# Altium PCB ModemMate.PcbDoc
Units mm, origin at the board's own origin, x right, y up, seen from the top; angles counter-clockwise.
Board outline 53.1 x 50 mm, 4 copper layers (Top Layer, GND, GND (Plane2), Bottom Layer), stack 1.582 mm thick; 22 components, 31 nets, 126 pads, 34 vias.
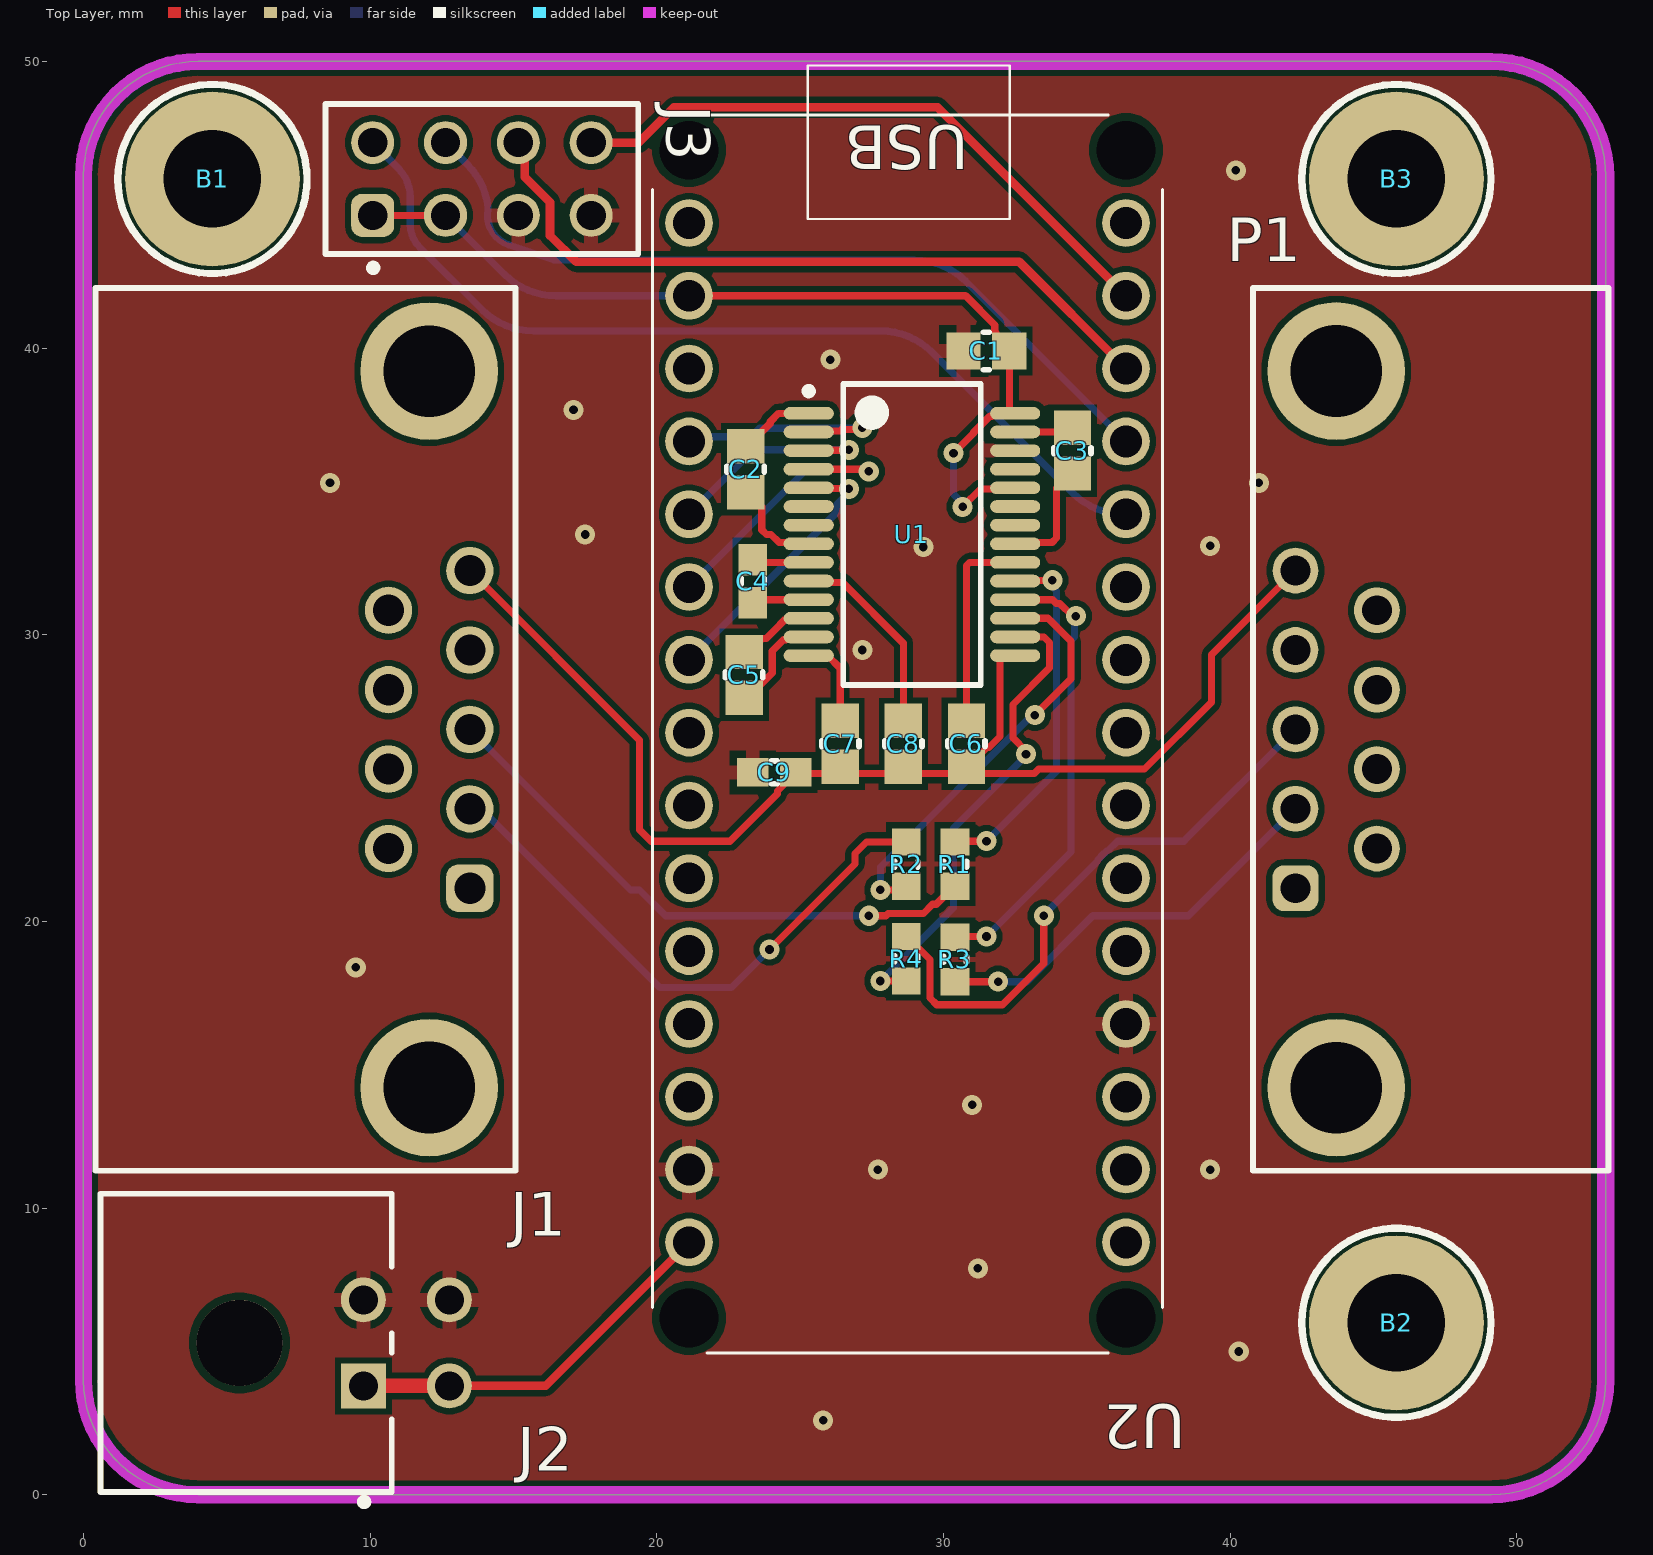
[diagram p0: Top Layer view]
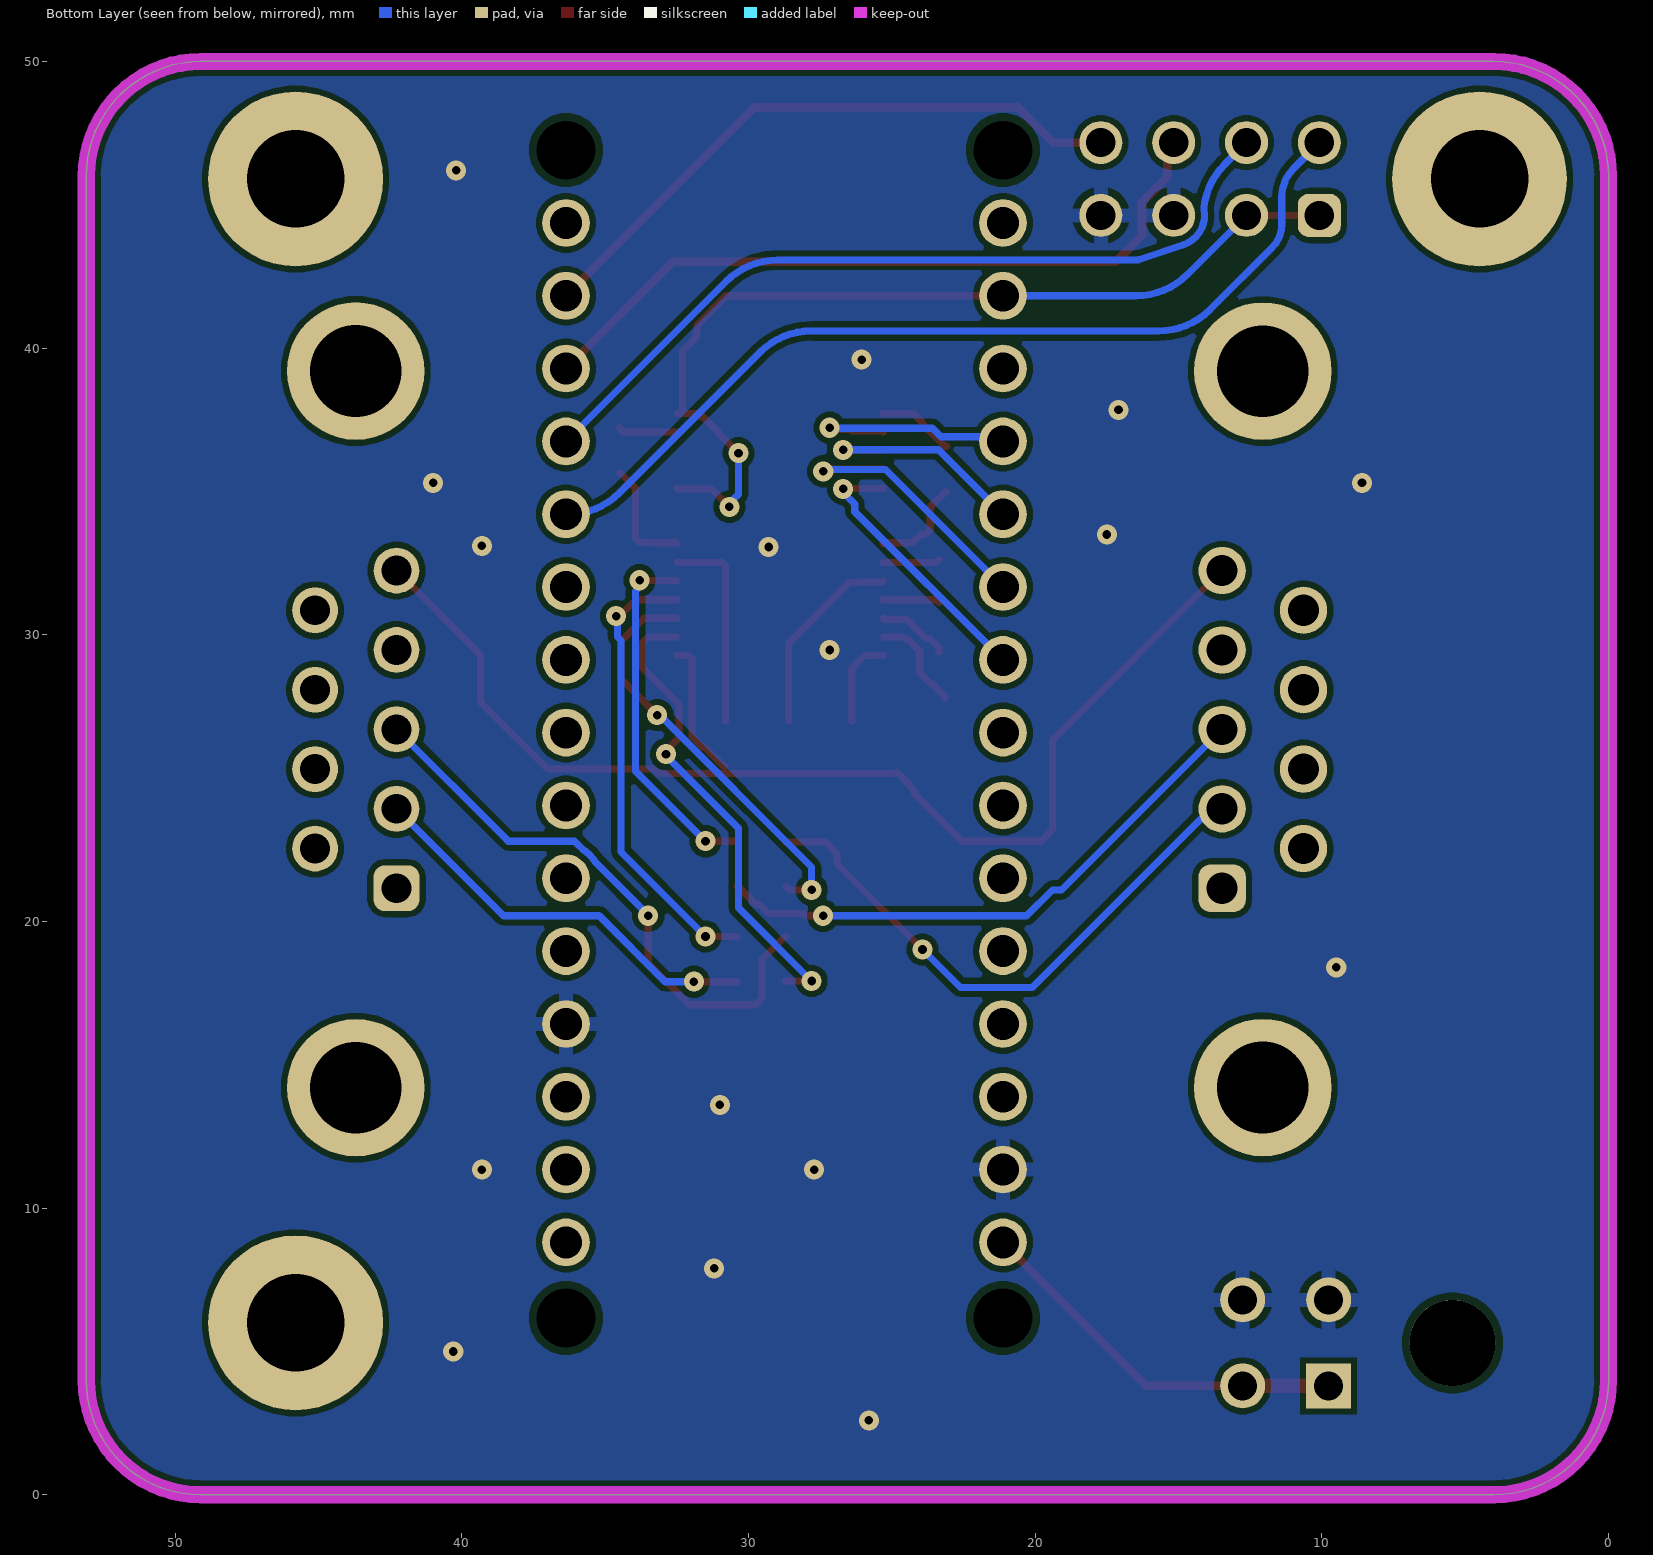
[diagram p1: Bottom Layer view, seen from below]
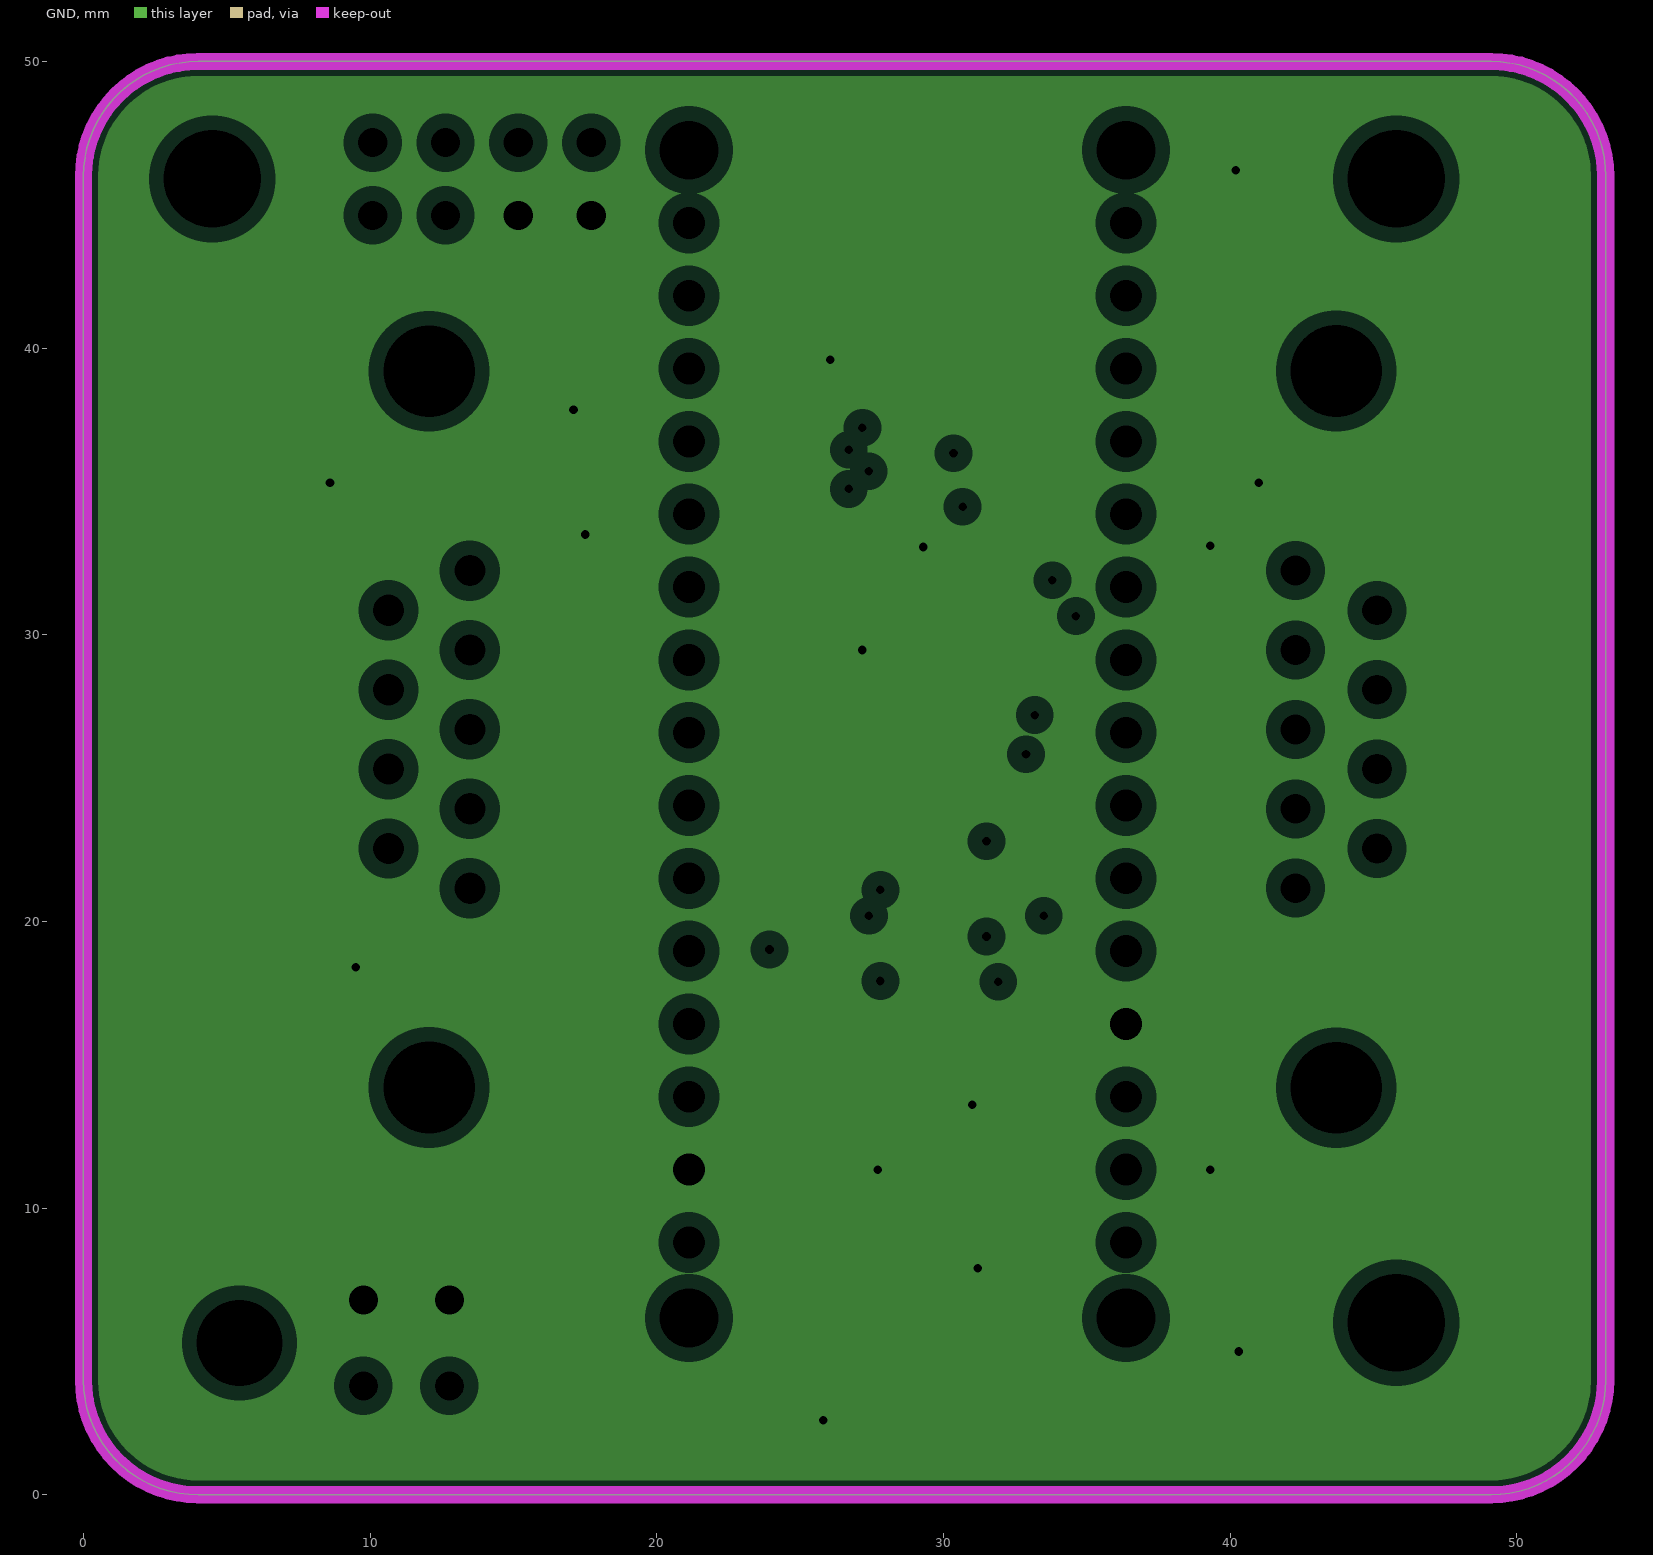
[diagram p2: GND, clearances drawn from the general rule]
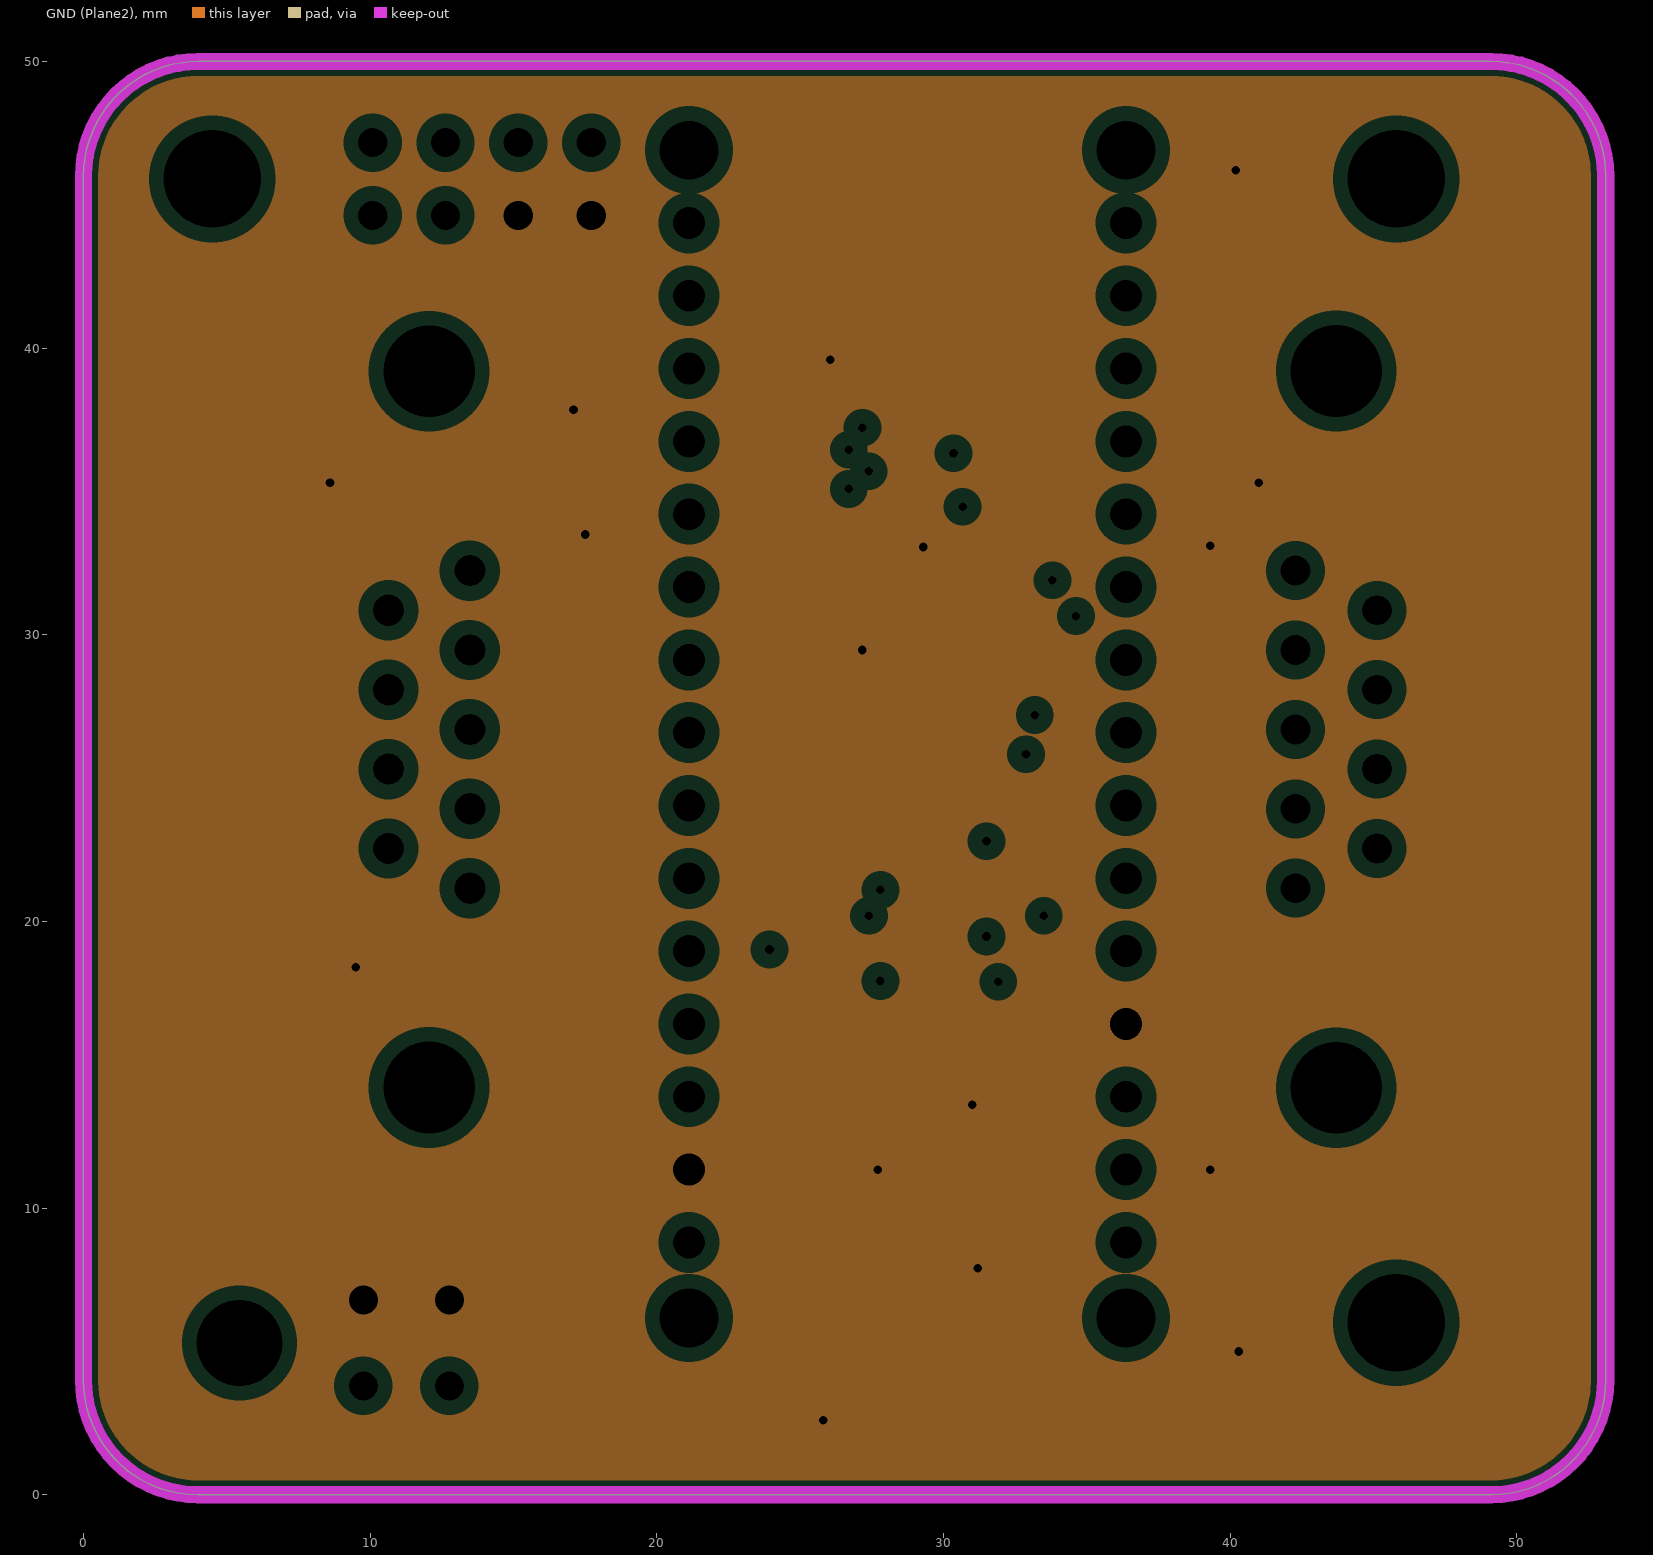
[diagram p3: GND (Plane2), clearances drawn from the general rule]
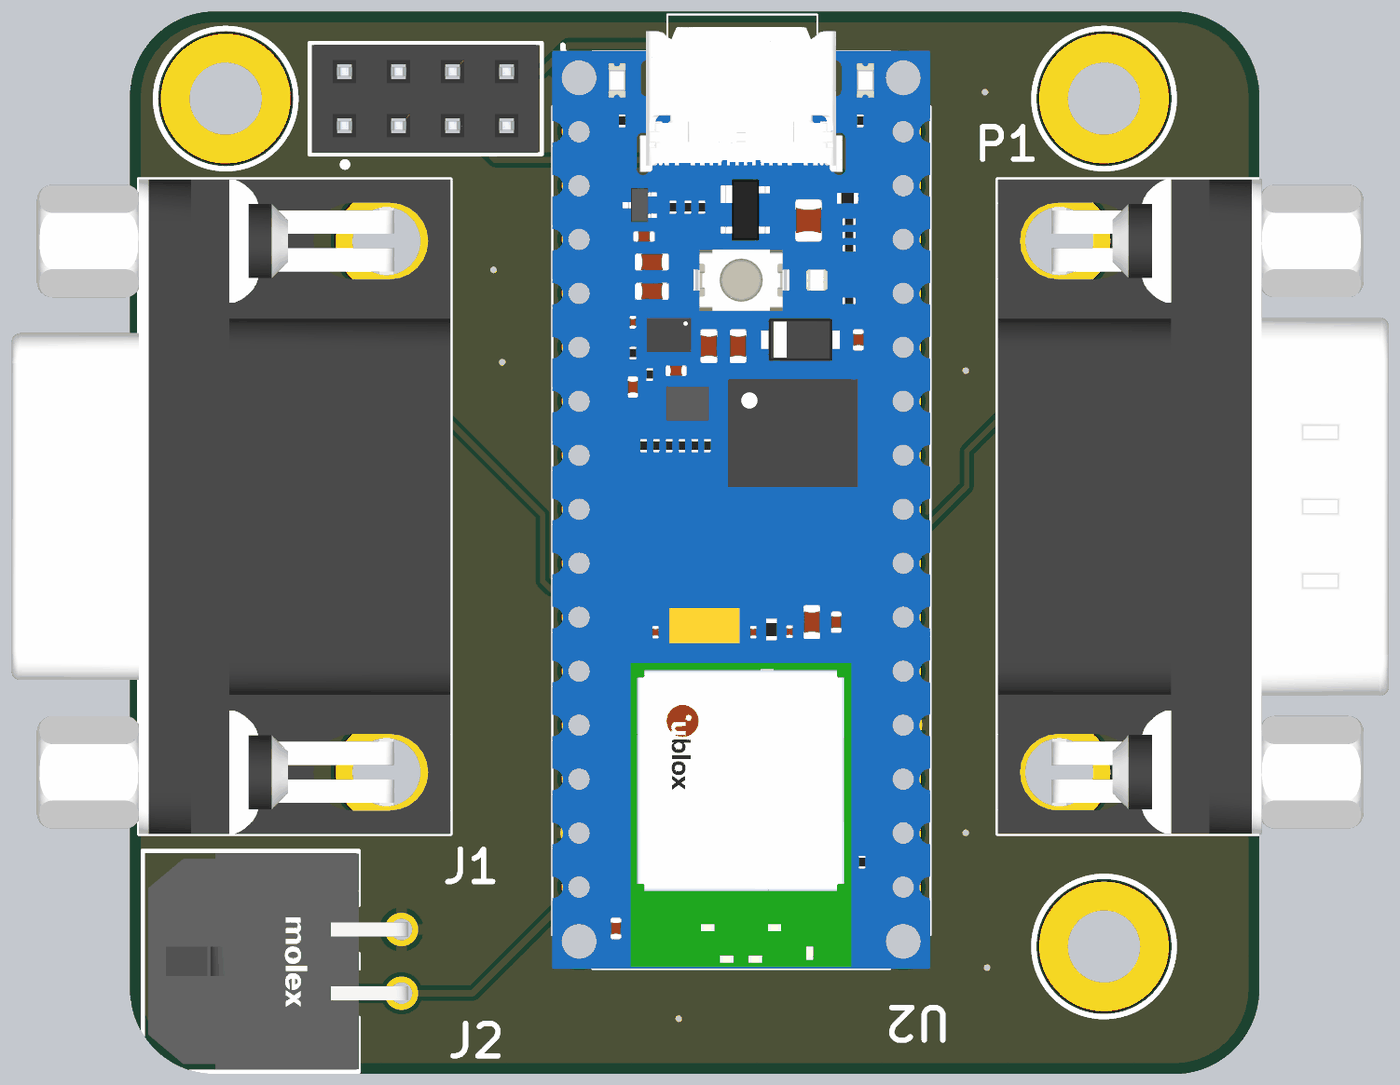
[diagram p4: 3D render of the assembled board from above, using the file's embedded part models]

## Layer stack, top to bottom
Top Solder: solder mask 0.0102, Solder Resist, Dk 3.5
Top Layer: signal copper 0.038
Dielectric1: core 0.21, FR-4, Dk 4.8
GND: plane copper 0.035, net GND
Dielectric 3: prepreg 1.016, Dk 4.2
GND (Plane2): plane copper 0.035, net GND
Dielectric 2: core 0.21, Dk 4.2
Bottom Layer: signal copper 0.038
Bottom Solder: solder mask 0.0102, Solder Resist, Dk 3.5

## Board outline
0,4 0,46 cw(c4,46) 4,50 49.1,50 cw(c49.1,46) 53.1,46 53.1,4 cw(c49.1,4) 49.1,0 4,0 cw(c4,4)

## Design rules (kind name [scope] priority, off if disabled: settings)
AssemblyTestPointUsage [All] p1 off:
AssemblyTestpoint [All] p1 off: testpointundercomponent=TRUE minsize=1.016 maxsize=2.54 preferedsize=1.524 minholesize=0 maxholesize=1.016 preferedholesize=0.813 testpointgrid=0.025 usegrid=TRUE gridtolerance=0 allowsidetop=TRUE allowsidebottom=TRUE
Clearance Mounting [HasFootprintPad('FESTEHULL-3MM',1) or HasFootprintPad('FESTEHULL-4MM',1)] p1: gap=1.295 ignorepadtopadclearanceinfootprint=FALSE except(0: Arc-Hole Track-Hole SMDPad-Hole THPad-Hole Via-Hole Fill-Hole Poly-Hole Region-Hole Text-Hole) // Make space for missaligned washers on mounting holes
Clearance Fiducial [HasFootprint('Fiducial')] p2: gap=0.508 ignorepadtopadclearanceinfootprint=FALSE except(0: Arc-Hole Track-Hole SMDPad-Hole THPad-Hole Via-Hole Fill-Hole Poly-Hole Region-Hole Text-Hole) // Make space around fiducials
Clearance "Min Clearance 2oz" [All] p3: gap=0.203 ignorepadtopadclearanceinfootprint=FALSE except(0.254: Arc-Hole Track-Hole SMDPad-Hole THPad-Hole Via-Hole Fill-Hole Poly-Hole Region-Hole Text-Hole) // Basic worst case isolation distance.
Clearance "Min Clearance 1oz" [All] p4 off: gap=0.152 ignorepadtopadclearanceinfootprint=FALSE except(0.254: Arc-Hole Track-Hole SMDPad-Hole THPad-Hole Via-Hole Fill-Hole Poly-Hole Region-Hole Text-Hole) // Basic worst case isolation distance.
ComponentClearance [not HasFootprint('TP') and not HasFootprint('M1x4') vs not HasFootprint('TP')  and not HasFootprint('M1x4')] p1: gap=0.254 collisioncheckmode=3 verticalgap=0.254 showdistances=FALSE
FabricationTestPointUsage [All] p1 off: valid=0 allowmultiple=FALSE
FabricationTestpoint [All] p1 off: side=3 testpointundercomponent=TRUE minsize=1.016 maxsize=2.54 preferedsize=1.524 minholesize=0 maxholesize=1.016 preferedholesize=0.813 testpointgrid=0.025 allowsidetop=TRUE allowsidebottom=TRUE usegrid=TRUE gridtolerance=0
HoleSize [All] p1: absolutevalues=TRUE maxlimit=6 minlimit=0.3 maxpercent=80.000 minpercent=20.000
MinimumSolderMaskSliver [All] p1 off: minsoldermaskwidth=0.051
NetsToIgnore [InNet('GND')] p1:
ParallelSegment [InNetClass('Cross-Talk')] p1: limit=50 gap=0.45
PlaneClearance [All] p1: clearance=0.508
PlaneConnect [All] p1: planeconnectstyle=Direct reliefexpansion=0.508 reliefentries=4 reliefconductorwidth=0.254 reliefairgap=0.254
PolygonConnect HighCurrent_PolyConnect [All] p1: thpad.connectstyle=Relief thpad.reliefconductorwidth=0.5 thpad.reliefentries=4 thpad.polygonreliefangle="90 Angle" thpad.airgapwidth=0.254 smdpad.connectstyle=Relief smdpad.reliefconductorwidth=0.5 smdpad.reliefentries=4 smdpad.polygonreliefangle="90 Angle" smdpad.airgapwidth=0.254 via.connectstyle=Direct via.reliefconductorwidth=0.5 via.reliefentries=4 via.polygonreliefangle="90 Angle" via.airgapwidth=0.254
PolygonConnect "Via to poly direct" [IsVia] p2: connectstyle=Direct reliefconductorwidth=0.254 reliefentries=4 polygonreliefangle="90 Angle" airgapwidth=0.254
PolygonConnect [All] p3: thpad.connectstyle=Relief thpad.reliefconductorwidth=0.254 thpad.reliefentries=4 thpad.polygonreliefangle="90 Angle" thpad.airgapwidth=0.254 smdpad.connectstyle=Relief smdpad.reliefconductorwidth=0.254 smdpad.reliefentries=4 smdpad.polygonreliefangle="90 Angle" smdpad.airgapwidth=0.254 via.connectstyle=Direct via.reliefconductorwidth=0.254 via.reliefentries=4 via.polygonreliefangle="90 Angle" via.airgapwidth=0.254
RoutingVias [All] p1: holewidth=0.3 width=0.7 viastyle="Through Hole" minholewidth=0.3 minwidth=0.5 maxholewidth=0.3 maxwidth=0.7
SilkToSilkClearance [All] p1 off: silktosilkclearance=0.254
SilkToSolderMaskClearance SilkscreenOverComponentPads [IsPad] p1 off: minsilkscreentomaskgap=0.254 clearancetoexposedcopper=TRUE
SolderMaskExpansion Via_mask [IsVia] p1: expansion=0.102 istentingtop=TRUE
SolderMaskExpansion [All] p2: expansion=0.051 istentingtop=FALSE
SupplyNets "Schematic Supply Nets_1" [InNet('3V3')] p1: voltage=0.000
SupplyNets "Schematic Supply Nets" [InNet('GND')] p2: voltage=0.000
Width [All] p1: maxlimit=2.54 minlimit=0.152 preferedwidth=0.203 minimp=50.000000 maximp=50.000000 favimp=50.000000
19 further rules are at their usual default settings.

## Components (designator, comment, footprint, x,y, rotation, side; value= is the part's Value field where it differs from the comment)
B1 "M3 inside minimum" "M3 minimum" 4.5,45.9 r0 top
B2 "M3 inside minimum" "M3 minimum" 45.8,6 r0 top
B3 "M3 inside minimum" "M3 minimum" 45.8,45.9 r0 top
C1 "2.2u/25V" C0805 31.5,39.9 r180 top value=2.2µF
C2 "0.47u/100V" C0805 23.1,35.775 r90 top value=470nF
C3 "0.47u/100V" C0805 34.5,36.425 r90 top value=470nF
C4 "0.1u/100V" C0603 23.35,31.875 r270 top value=100nF
C5 "0.47u/100V" C0805 23.05,28.6 r270 top value=470nF
C6 "2.2u/25V" C0805 30.8,26.2 r270 top value=2.2µF
C7 "0.47u/100V" C0805 26.4,26.2 r270 top value=470nF
C8 "0.47u/100V" C0805 28.6,26.2 r270 top value=470nF
C9 "10n/100V" C0603 24.1,25.2 r180 top value=10nF
J1 "Dsub 9 pin Female right angle" 618009231321 7.7,26.7 r270 top
J2 "Micro-Fit 4pin Horizontal THT" 43045-0400 5.8,5.3 r270 top
J3 "Pin header 2x4" 61300821821 13.9,45.9 r0 top
P1 "Dsub 9 pin Male right angle" 618009231221 47,26.7 r90 top
R1 "0R" R0603 30.4,22 r90 top value=0
R2 "0R" R0603 28.7,22 r270 top value=0
R3 "0R" R0603 30.4,18.675 r90 top value=0
R4 "0R" R0603 28.7,18.7 r270 top value=0
U1 "MAX3250EAI+" "SSOP-28P, no-thermal" 28.9,33.5 r0 top
U2 "ArduinoNano ESP32" "Copy of New footprint 1" 29.5,30 r180 top locked

## Footprints (in the part's own frame and the unit in brackets; to place one, negate y for a bottom-side part, rotate by r counter-clockwise, add the part's x,y. Pads: shape width x height; smd on the part's side, far side on the other; paste and mask are expansions set on the pad)
43045-0400 [mm]
  rect 1.57x1.57 hole 1.02 paste-2539.97 mask+0: 1(1.5,3.965)
  round 1.57 hole 1.02 paste-2539.97 mask+0: 2(-1.5,3.965) 3(1.5,6.965) 4(-1.5,6.965)
  round 3 hole 3 unplated paste-2539.97 mask+0: H1(0,-0.355)
  silkscreen extent -5.2,-5.21 5.67,4.95, body extent -5.3,-5.31 5.3,7.85, height 0.25
61300821821 [mm] "Socket Header, Pitch 2.54 mm, THT, Vertical, dual row, 8p"
  rrect50% 1.5x1.5 hole 1.02: 1(-3.81,-1.27)
  round 1.5 hole 1.02: 2(-3.81,1.27) 3(-1.27,-1.27) 4(-1.27,1.27) 5(1.27,-1.27) 6(1.27,1.27) 7(3.81,-1.27) 8(3.81,1.27)
  silkscreen extent -5.46,-3.22 5.46,2.62, body extent -5.33,-2.54 5.33,2.54, height 8.45
618009231221 [mm] "9 pins, right angled, 8.08mm, with hex screw"
  rrect50% 1.6x1.6 hole 1.04: 1(-5.54,4.72)
  round 1.6 hole 1.04: 2(-2.77,4.72) 3(0,4.72) 4(2.77,4.72) 5(5.54,4.72) 6(-4.155,1.88) 7(-1.385,1.88) 8(1.385,1.88) 9(4.155,1.88)
  round 4.8 hole 3.2: M1(-12.5,3.3) M2(12.5,3.3)
  silkscreen extent -15.4,-6.2 15.4,6.2, body extent -15.4,-12.2 15.4,6.2, height 12.57
618009231321 [mm] "9 pins, right angled, 10.3mm, with hex screw"
  rrect50% 1.65x1.65 hole 1.09: 1(5.54,5.78)
  round 1.65 hole 1.09: 2(2.77,5.78) 3(0,5.78) 4(-2.77,5.78) 5(-5.54,5.78) 6(4.155,2.94) 7(1.385,2.94) 8(-1.385,2.94) 9(-4.155,2.94)
  round 4.8 hole 3.2: M1(-12.495,4.36) M2(12.495,4.36)
  silkscreen extent -15.4,-7.28 15.4,7.37, body extent -15.41,-13.28 15.41,7.37, height 12.57
C0603 [mm] "Chip Capacitor, 2-Leads, Body 1.60x0.80mm, IPC Medium Density"
  rect 1.1x1 smd: 1(-0.75,0) 2(0.75,0)
  silkscreen extent -0.1,-0.4 0.1,0.4, body extent -0.9,-0.5 0.9,0.5, height 1
C0805 [mm] "Chip Capacitor, 2-Leads, Body 2.00x1.20mm, IPC Medium Density"
  rect 1.2x1.3 smd: 1(-0.8,0) 2(0.8,0)
  silkscreen extent -0.1,-0.65 0.1,0.65, body extent -1.05,-0.63 1.05,0.63, height 0.95
"Copy of New footprint 1" [mm]
  round 1.665 hole 1.11: 1(-6.866,21.194) 2(-6.866,18.654) 3(-6.866,16.114) 4(-6.866,13.574) 5(-6.866,11.034) 6(-6.866,8.494) 7(-6.866,5.954) 8(-6.866,3.414) 9(-6.866,0.874) 10(-6.866,-1.666) 11(-6.866,-4.206) 12(-6.866,-6.746) 13(-6.866,-9.286) 14(-6.866,-11.826) 15(-6.866,-14.366) 16(8.374,-14.366) 17(8.374,-11.826) 18(8.374,-9.286) 19(8.374,-6.746) 20(8.374,-4.206) 21(8.374,-1.666) 22(8.374,0.874) 23(8.374,3.414) 24(8.374,5.954) 25(8.374,8.494) 26(8.374,11.034) 27(8.374,13.574) 28(8.374,16.114) 29(8.374,18.654) 30(8.374,21.194)
  round 1.025 hole 2.05 unplated: MH1(-6.866,23.834) MH2(8.374,23.834) MH3(-6.866,-16.906) MH4(8.374,-16.906)
  silkscreen extent -8.14,-19.86 9.64,25.05, body extent -8.13,-19.26 9.65,25.03, height 7.29
"M3 minimum" [mm] "Mounting hole for M3 bolts not reccomended for nuts(tools will not fit)"
  round 6.1 hole 3.4: 1(0,0)
  silkscreen extent -3.3,-3.3 3.3,3.3
R0603 [mm] "Resistor 0603"
  rect 0.95x1 smd: 1(-0.775,0) 2(0.775,0)
  silkscreen extent -0.1,-0.4 0.1,0.4, body extent -0.8,-0.4 0.8,0.4, height 0.4
"SSOP-28P, no-thermal" [mm] "Form TI"
  oval 1.75x0.44 smd mask+0.07: 1(-3.6,4.225) 2(-3.6,3.575) 3(-3.6,2.925) 4(-3.6,2.275) 5(-3.6,1.625) 6(-3.6,0.975) 7(-3.6,0.325) 8(-3.6,-0.325) 9(-3.6,-0.975) 10(-3.6,-1.625) 11(-3.6,-2.275) 12(-3.6,-2.925) 13(-3.6,-3.575) 14(-3.6,-4.225) 15(3.6,-4.225) 16(3.6,-3.575) 17(3.6,-2.925) 18(3.6,-2.275) 19(3.6,-1.625) 20(3.6,-0.975) 21(3.6,-0.325) 22(3.6,0.325) 23(3.6,0.975) 24(3.6,1.625) 25(3.6,2.275) 26(3.6,2.925) 27(3.6,3.575) 28(3.6,4.225)
  silkscreen extent -3.72,-5.25 2.4,5.25, body extent -3.9,-5.25 3.9,5.25, height 2

## Part data
B1 B2 B3: library part CMP-00028-00013-3, "smaller M3 mounting holde for inside the PCB. should not be used for nuts(tools will not fit)", Case/Package=M3
C1 C6: library part CMP-00124-3, "2.2µF, 25V, 0805", Case/Package=0805, Dielectric=X7R, Tolerance=10%, Voltage=25V
C2 C3 C5 C7 C8: library part CMP-001-00015-1, "0.47uF, 100V, 0805", Case/Package=0805, Dielectric=Ceramic, Tolerance=10%, Voltage=100V
C4: library part CMP-001-00000-2, "0.1μF, 100V, 0603", Case/Package=0603, Dielectric=X7R, Tolerance=10%, Voltage=100V
C9: library part CMP-00133-2, "10nF, 100V, 0603", Case/Package=0603, Dielectric=X7R, Tolerance=10%, Voltage=100V
J1: library part CMP-00660-1, "9 Way Right Angle Through Hole Pcb D-sub Connector Socket, 2.77MM, 2.84MM Pitch", Current Rating=3A, Manufacturer="Wurth elektronik", Part name=618009231321, Voltage Rating=125V, Contact Plating=Gold, Mounting Angle="Right Angle", Mounting Style="Through Hole", Number of Positions=9, Number of Rows=2
J2: library part CMP-002-00021-4, "Rectangular Power Connector, 4 Contact(s), Male, Solder Terminal, Plug", Current Rating=8.5A, Manufacturer=Molex, Part name=43045-0400, Voltage Rating=250V, Contact Plating=Tin, Mounting Angle="Right Angle", Mounting Style="Through Hole", Number of Positions=4, Number of Rows=2
J3: library part CMP-00552-1, "Board Connector, 8 Contact(s), 2 Row(s), Female, Straight, 0.1 inch Pitch, Solder Terminal, Locking, Black Insulator, Socket", Current Rating=3A, Manufacturer="Wurth Elektronik", Part name=61300821821, Voltage Rating=250V, Contact Plating=Gold, Mounting Angle=Vertical, Mounting Style="Through Hole", Number of Positions=8, Number of Rows=2
P1: library part CMP-00659-1, "9 Way Right Angle Through Hole Pcb D-sub Connector Plug, 2.77MM, 2.84MM Pitch", Current Rating=3A, Manufacturer="Wurth Eletronik", Part name=618009231221, Voltage Rating=125V, Contact Plating=Gold, Mounting Angle="Right Angle", Mounting Style="Through Hole", Number of Positions=9, Number of Rows=2
R1 R2 R3 R4: library part CMP-00047-3, "Resistor 0R, 0603, 1%, SMD", Case/Package=0603, Power=100mW, Tolerance=1%, Voltage=75V
U1: library part CMP-00252-2, "isolated Line Transceiver, 2 Func, 2 Driver, 2 Rcvr, BICMOS, PDSO28", Case/Package="SSOP 28", Current Rating=35mA, Manufacturer=Maxim, Max Supply Voltage=5.5V, Min Operating Temperature=-40°C, Min Supply Voltage=3V, Max Supply Current=35mA, Part name=MAX3250EAI+, Voltage Rating=5.5V
U2: library part CMP-00661-1, "Arduino nano development board", Case/Package=Nano, Current Rating=25mA, Manufacturer=Arduino, Part name="Nano ESP32", Voltage Rating=5V

## Via types
v1: diameter 0.7, hole 0.3, Top Layer to Bottom Layer, tented both sides, 34 vias

## Nets (pads, with @x,y where several pads share a name; then routed paths per layer and width w, separated by ;. In a path a pad name is that pad's centre, name@x,y a point inside that pad or via, vN(x,y) a via of type N, cw(c..) or ccw(c..) an arc to the next point about the centre after c; other vN are vias at no path point)
3V3: C1.1 J3.1 J3.3 U1.24 U1.28 U2.17 | length 33.4
  Top Layer w0.25: J3.1 J3.3 ; U2.17 30.774,41.826 31.789,40.811 31.789,40.571 31.825,40.535 31.825,40.375 C1.1 32.3,37.846 U1.28@32.421,37.725 ; v1(30.35,36.334) 31.057,37.041 31.057,37.063 31.618,37.623 31.692,37.623 31.794,37.725 U1.28@32.421,37.725 ; v1(30.668,34.464) 31.292,35.089 32.464,35.089 U1.24 ; U1.28 U1.28@32.421,37.725
  Bottom Layer w0.25: J3.3 14.69,42.57 ccw(c16.486,44.366) 16.486,41.826 U2.17 ; v1(30.35,36.334) 30.35,34.903 30.668,34.586 v1(30.668,34.464)
GND: C1.2 C9.2 J2.2 J2.4 J3.5 J3.7 U1.26 U2.4 U2.29
  other v1: 25.8,2.6 40.3,5 31.2,7.9 27.713,11.346 39.3,11.346 31,13.6 9.5,18.4 27.173,29.47 29.301,33.063 39.3,33.1 17.5,33.5 8.6,35.3 41,35.3 17.094,37.846 26.057,39.6 40.2,46.2
ISO_GND: C6.2 C7.2 C8.2 C9.1 J1.5 P1.5 U1.15 | length 44.4
  Top Layer w0.25: J1.5 19.4,26.32 19.4,23.2 19.8,22.8 22.55,22.8 24.206,24.456 24.206,24.556 24.425,24.775 24.425,24.825 24.8,25.2 C9.1 24.892,25.158 33.166,25.158 33.323,25.315 37.015,25.315 39.347,27.647 39.347,29.307 P1.5 ; C6.2 30.85,25.4 31.522,26.072 31.586,26.072 31.968,26.454 31.968,29.187 32.056,29.275 U1.15
NetC2_1: C2.1 U1.8 | length 3.4
  Top Layer w0.25: C2.1 23.15,34.975 23.661,34.464 23.661,33.666 23.824,33.503 23.986,33.503 24.264,33.225 24.46,33.225 24.474,33.211 25.264,33.211 U1.8
NetC2_2: C2.2 U1.1 | length 2.7
  Top Layer w0.25: C2.2 23.15,36.575 23.956,37.381 23.956,37.431 24.25,37.725 U1.1
NetC3_1: C3.1 U1.21 | length 4
  Top Layer w0.25: U1.21 32.536,33.211 33.326,33.211 33.34,33.225 33.792,33.225 33.939,33.372 33.939,35.114 34.45,35.625 C3.1
NetC3_2: C3.2 U1.27 | length 2.1
  Top Layer w0.25: U1.27 34.35,37.075 C3.2
NetC4_1: C4.1 U1.9 | length 2
  Top Layer w0.25: C4.1 23.45,32.525 U1.9
NetC4_2: C4.2 U1.11 | length 2
  Top Layer w0.25: C4.2 23.45,31.225 U1.11
NetC5_1: C5.1 U1.12 | length 2.5
  Top Layer w0.25: C5.1@23.35,29.4 23.35,29.55 23.675,29.875 23.821,29.875 24.097,30.151 ; 24.097,30.152 24.483,30.539 25.264,30.539 U1.12
NetC5_2: C5.2 U1.13 | length 3.5
  Top Layer w0.25: C5.2@23.15,27.8 23.15,27.85 23.575,28.275 23.639,28.275 24.028,28.664 24.028,29.433 24.425,29.83 24.499,29.83 24.594,29.925 U1.13
NetC6_1: C6.1 U1.20 | length 7.2
  Top Layer w0.25: C6.1 30.8,32.421 30.904,32.525 U1.20
NetC7_1: C7.1 U1.14 | length 3.1
  Top Layer w0.25: U1.14 25.955,29.275 26.4,28.83 C7.1
NetC8_1: C8.1 U1.10 | length 6.9
  Top Layer w0.25: U1.10 25.336,31.839 26.126,31.839 26.14,31.825 26.484,31.825 28.6,29.709 C8.1
NetJ3_2: J3.2 U2.11 | length 32.4
  Bottom Layer w0.25: J3.2 10.966,46.294 cw(c9.919,45.246) 11.4,45.246 11.4,44.325 ccw(c12.567,44.325) 11.742,43.5 13.898,41.344 ccw(c15.694,43.14) 15.694,40.6 27.805,40.6 cw(c27.805,38.06) 29.601,39.856 34.507,34.95 ccw(c36.303,36.746) 36.303,34.206 U2.11
NetJ3_4: J3.4 U2.12 | length 28.5
  Bottom Layer w0.25: J3.4 13.389,46.411 cw(c11.593,44.615) 14.115,44.915 cw(c13.867,44.886) 14.112,44.838 ccw(c15.17,44.63) 14.125,44.364 ccw(c15.17,44.63) 14.827,43.608 16.392,43.083 ccw(c16.471,43.32) 16.471,43.07 28.99,43.07 cw(c28.99,40.53) 30.786,42.326 U2.12
NetJ3_6: J3.6 U2.13 | length 25.7
  Top Layer w0.3: J3.6 15.39,46.95 15.39,45.97 16.273,45.087 16.273,43.927 17.188,43.012 32.64,43.012 U2.13
NetJ3_8: J3.8 U2.14 | length 21.9
  Top Layer w0.3: J3.8 19.369,47.17 20.599,48.4 29.792,48.4 U2.14
NetR1_2: R1.2 U1.19 | length 12.6
  Top Layer w0.25: R1.2 30.425,22.8 v1(31.5,22.8) ; U1.19 32.514,31.889 33.786,31.889 v1(33.8,31.903)
  Bottom Layer w0.25: v1(31.5,22.8) 33.942,25.242 33.942,31.532 33.886,31.588 33.886,31.817 v1(33.8,31.903)
NetR2_2: R2.2 U1.17 | length 14.7
  Top Layer w0.25: v1(27.8,21.1) 28.575,21.1 R2.2 ; U1.17 33.648,30.575 34.45,29.773 34.45,28.463 v1(33.187,27.2)
  Bottom Layer w0.25: v1(27.8,21.1) 27.8,21.9 33.1,27.2 v1(33.187,27.2)
NetR3_2: R3.2 U1.18 | length 15.9
  Top Layer w0.25: R3.2 30.425,19.475 v1(31.5,19.475) ; U1.18 33.8,31.225 33.932,31.093 34.059,31.093 34.499,30.654 v1(34.62,30.654)
  Bottom Layer w0.25: v1(31.5,19.475) 34.45,22.425 34.45,29.804 34.575,29.929 34.575,30.608 v1(34.62,30.654)
NetR4_2: R4.2 U1.16 | length 16.8
  Top Layer w0.25: v1(27.8,17.925) R4.2 ; U1.16 33.51,29.925 33.703,29.732 33.703,28.848 32.421,27.566 32.421,26.405 32.877,25.949 v1(32.877,25.836)
  Bottom Layer w0.25: v1(27.8,17.925) 30.35,20.475 30.35,23.25 32.877,25.777 v1(32.877,25.836)
RX_RS232_1: J1.3 R1.1 | length 20
  Top Layer w0.25: v1(27.4,20.2) 27.986,20.2 28.064,20.278 29.301,20.278 29.621,20.598 29.748,20.598 30.375,21.225 R1.1
  Bottom Layer w0.25: J1.3 19.08,21.1 19.4,21.1 20.3,20.2 v1(27.4,20.2)
RX_RS232_2: P1.2 R3.1 | length 14.4
  Top Layer w0.25: R3.1 v1(31.906,17.9)
  Bottom Layer w0.25: v1(31.906,17.9) 32.911,17.9 35.211,20.2 38.55,20.2 P1.2
RX_UART_1: U1.2 U2.19 | length 8.2
  Top Layer w0.25: U1.2 25.336,37.111 26.399,37.111 26.448,37.16 27.111,37.16 v1(27.173,37.223)
  Bottom Layer w0.25: U2.19 21.286,36.906 23.288,36.906 23.583,37.202 27.153,37.202 v1(27.173,37.223)
RX_UART_2: U1.3 U2.20 | length 7.9
  Top Layer w0.25: U1.3 25.314,36.439 26.686,36.439 v1(26.7,36.453)
  Bottom Layer w0.25: U2.20 23.373,36.453 v1(26.7,36.453)
TX_RS232_1: J1.2 R2.1 | length 20.1
  Top Layer w0.25: v1(23.932,19.023) 26.915,22.006 26.915,22.373 27.317,22.775 R2.1
  Bottom Layer w0.25: J1.2 13.87,23.93 20.1,17.7 22.61,17.7 v1(23.932,19.023)
TX_RS232_2: P1.3 R4.1 | length 20.3
  Top Layer w0.25: R4.1 28.725,19.475 29.528,18.672 29.528,17.333 29.764,17.097 32.062,17.097 33.5,18.534 v1(33.5,20.2)
  Bottom Layer w0.25: v1(33.5,20.2) 33.5,20.23 35.347,22.077 35.425,22.185 cw(c36.366,21.506) 35.687,22.447 35.795,22.525 35.996,22.727 36.07,22.8 38.38,22.8 38.453,22.873 P1.3
TX_UART1: U1.4 U2.21 | length 10.1
  Top Layer w0.25: U1.4 27.322,35.775 v1(27.394,35.703)
  Bottom Layer w0.25: U2.21 25.227,35.767 27.33,35.767 v1(27.394,35.703)
TX_UART2: U1.5 U2.22 | length 9.7
  Top Layer w0.25: U1.5 25.318,35.107 26.682,35.107 v1(26.7,35.089)
  Bottom Layer w0.25: U2.22 26.293,34.293 26.293,34.561 26.7,34.967 v1(26.7,35.089)
Vin: J2.1 J2.3 U2.30 | length 13.4
  Top Layer w0.3: J2.3 16.12,3.8 U2.30
  Top Layer w0.5: J2.1 J2.3
pads on no net: B1.1 B2.1 B3.1 J1.1 J1.4 J1.6 J1.7 J1.8 J1.9 J1.M1 J1.M2 J2.H1 P1.1 P1.4 P1.6 P1.7 P1.8 P1.9 P1.M1 P1.M2 U1.6 U1.7 U1.22 U1.23 U1.25 U2.1 U2.2 U2.3 U2.5 U2.6 U2.7 U2.8 U2.9 U2.10 U2.15 U2.16 U2.18 U2.23 U2.24 U2.25 U2.26 U2.27 U2.28 U2.MH1 U2.MH2 U2.MH3 U2.MH4

## Polygon pours and split planes (outlines as drawn)
GND on Bottom Layer "NONET_L01_P-001" (solid, remove dead copper, pour order 1): 0,47.7 2.3,50 50.7,50 53.1,47.6 53.1,2.3 50.8,0 2.3,0 0,2.3 0,4
GND on Top Layer "NONET_L01_P-001" (solid, remove dead copper, pour order 0): 0,47.7 2.3,50 50.7,50 53.1,47.6 53.1,2.3 50.8,0 2.3,0 0,2.3 0,4
GND on GND (Plane2) (split plane): 49.349,49.483 49.597,49.456 49.842,49.412 50.084,49.35 50.32,49.272 50.55,49.176 50.773,49.065 50.988,48.937 51.192,48.795 51.387,48.639 51.569,48.469 51.739,48.287 51.895,48.092 52.037,47.888 52.165,47.673 52.276,47.45 52.372,47.22 52.45,46.984 52.512,46.742 52.556,46.497 52.583,46.249 52.591,46.016 52.59,46 52.59,4 52.591,3.984 52.583,3.751 52.556,3.503 52.512,3.258 52.45,3.016 52.372,2.78 52.276,2.55 52.165,2.327 52.037,2.112 51.895,1.908 51.739,1.713 51.569,1.531 51.387,1.361 51.192,1.205 50.988,1.063 50.773,0.935 50.55,0.824 50.32,0.728 50.084,0.65 49.842,0.588 49.597,0.544 49.349,0.517 49.116,0.509 49.1,0.51 4,0.51 3.984,0.509 3.751,0.517 3.503,0.544 3.258,0.588 3.016,0.65 2.78,0.728 2.55,0.824 2.327,0.935 2.112,1.063 1.908,1.205 1.713,1.361 1.531,1.531 1.361,1.713 1.205,1.908 1.063,2.112 0.935,2.327 0.824,2.55 0.728,2.78 0.65,3.016 0.588,3.258 0.544,3.503 0.517,3.751 0.509,3.984 0.51,4 0.51,46 0.509,46.016 0.517,46.249 0.544,46.497 0.588,46.742 0.65,46.984 0.728,47.22 0.824,47.45 0.935,47.673 1.063,47.888 1.205,48.092 1.361,48.287 1.531,48.469 1.713,48.639 1.908,48.795 2.112,48.937 2.327,49.065 2.55,49.176 2.78,49.272 3.016,49.35 3.258,49.412 3.503,49.456 3.751,49.483 3.984,49.491 4,49.49 49.1,49.49 49.116,49.491
GND on GND (split plane): 49.349,49.483 49.597,49.456 49.842,49.412 50.084,49.35 50.32,49.272 50.55,49.176 50.773,49.065 50.988,48.937 51.192,48.795 51.387,48.639 51.569,48.469 51.739,48.287 51.895,48.092 52.037,47.888 52.165,47.673 52.276,47.45 52.372,47.22 52.45,46.984 52.512,46.742 52.556,46.497 52.583,46.249 52.591,46.016 52.59,46 52.59,4 52.591,3.984 52.583,3.751 52.556,3.503 52.512,3.258 52.45,3.016 52.372,2.78 52.276,2.55 52.165,2.327 52.037,2.112 51.895,1.908 51.739,1.713 51.569,1.531 51.387,1.361 51.192,1.205 50.988,1.063 50.773,0.935 50.55,0.824 50.32,0.728 50.084,0.65 49.842,0.588 49.597,0.544 49.349,0.517 49.116,0.509 49.1,0.51 4,0.51 3.984,0.509 3.751,0.517 3.503,0.544 3.258,0.588 3.016,0.65 2.78,0.728 2.55,0.824 2.327,0.935 2.112,1.063 1.908,1.205 1.713,1.361 1.531,1.531 1.361,1.713 1.205,1.908 1.063,2.112 0.935,2.327 0.824,2.55 0.728,2.78 0.65,3.016 0.588,3.258 0.544,3.503 0.517,3.751 0.509,3.984 0.51,4 0.51,46 0.509,46.016 0.517,46.249 0.544,46.497 0.588,46.742 0.65,46.984 0.728,47.22 0.824,47.45 0.935,47.673 1.063,47.888 1.205,48.092 1.361,48.287 1.531,48.469 1.713,48.639 1.908,48.795 2.112,48.937 2.327,49.065 2.55,49.176 2.78,49.272 3.016,49.35 3.258,49.412 3.503,49.456 3.751,49.483 3.984,49.491 4,49.49 49.1,49.49 49.116,49.491

## Keep-outs
Keep-Out Layer:
  the board outline again, w0.6

## Silkscreen, mask and mechanical layers (free items; w line width, h text height)
Outline:
  the board outline again, w0.1
Sheet:
  lines w0.2: -8,152 54,152 ; -8,155 54,155 ; -8,158 54,158 ; -8,161 54,161 ; -8,164 54,164 ; -8,167 54,167 ; -8,170 54,170 ; -8,173 54,173 ; -8,176 54,176 ; -8,179 54,179 ; -8,182 54,182 ; -8,185 54,185 ; 6.4,179 6.4,185 ; 16.6,149 16.6,176 ; -10,-10 160,-10 160,190 -10,190 -10,-10 ; -8,149 54,149 54,188 -8,188 -8,149
  text ".ProjectDescription" at -6.6,185.6 h1.5
  text ".ProjectName" at -6.6,182.8 h1.5
  text "Rev:" at 8.4,182.8 h1.5
  text ".ItemRevision" at 13.5,182.8 h1.5
  text ".Print_Date" at -6.6,179.8 h1.5
  text ".ProjectOwner" at 8.4,179.8 h1.5
  text "Board spesifications" at -6.6,176.8 h1.5
  text "Surface finish" at -6.6,173.8 h1.5
  text ".SurfaceFinish" at 18,173.8 h1.5
  text "Via type" at -6.6,170.8 h1.5
  text ".ViaType" at 18,170.8 h1.5
  text "Via fill type" at -6.6,167.8 h1.5
  text ".ViaFillType" at 18,167.8 h1.5
  text "Specified stackup" at -6.6,164.8 h1.5
  text ".SpecifiedStackup" at 18,164.8 h1.5
  text "Controlled impedance" at -6.6,161.8 h1.5
  text ".ControlledImpedance" at 18,161.8 h1.5
  text "Silkprint top" at -6.6,158.8 h1.5
  text ".SilkprintTop" at 18,158.8 h1.5
  text "Solder stop top" at -6.6,155.8 h1.5
  text ".SolderStopTop" at 18,155.8 h1.5
  text "Solder stop bottom" at -6.6,152.8 h1.5
  text ".SolderStopBottom" at 18,152.8 h1.5
  text "Silkprint bottom" at -6.6,149.8 h1.5
  text ".SilkprintBottom" at 18,149.8 h1.5
Drill Drawing:
  circle w0.1: c91.215,144.256 r0.556
  lines w0.1: 90.659,138.7 91.77,138.7 91.77,139.811 90.659,139.811 90.659,138.7 ; 90.659,141.2 91.215,141.478 91.77,141.2 91.493,141.756 91.77,142.311 91.215,142.034 90.659,142.311 90.937,141.756 90.659,141.2 ; 90.659,146.2 90.659,146.478 90.937,146.756 90.659,147.034 90.659,147.311 90.937,147.311 91.215,147.034 91.493,147.311 91.77,147.311 91.77,147.034 91.493,146.756 91.77,146.478 91.77,146.2 91.493,146.2 91.215,146.478 90.937,146.2 90.659,146.2 ; 90.659,149.256 91.215,148.7 91.77,149.256 91.215,149.811 90.659,149.256 ; 90.659,151.478 90.937,151.478 90.937,151.2 91.493,151.2 91.493,151.478 91.77,151.478 91.77,152.034 91.493,152.034 91.493,152.311 90.937,152.311 90.937,152.034 90.659,152.034 90.659,151.478 ; 90.659,153.978 90.937,153.978 91.215,153.7 91.493,153.978 91.77,153.978 91.493,154.256 91.77,154.534 91.493,154.534 91.215,154.811 90.937,154.534 90.659,154.534 90.937,154.256 90.659,153.978 ; 90.659,156.2 91.77,156.2 91.77,157.311 90.659,157.311 90.659,156.2 ; 90.659,159.811 91.77,159.811 91.215,158.7 90.659,159.811 ; 90.882,138.922 91.548,138.922 91.548,139.589 90.882,139.589 90.882,138.922
  lines w0.381: 89.684,137.95 153.266,137.95 ; 89.684,160.45 153.266,160.45 ; 90.191,160.309 98.714,160.309 118.067,160.309 135.962,160.309 149.483,160.309 ; 90.191,162.809 98.714,162.809 118.067,162.809 135.962,162.809 149.483,162.809 ; 90.191,165.309 98.714,165.309 118.067,165.309 135.962,165.309 149.483,165.309 ; 90.191,167.809 98.714,167.809 118.067,167.809 135.962,167.809 149.483,167.809 ; 90.191,170.309 98.714,170.309 118.067,170.309 135.962,170.309 149.483,170.309 ; 90.191,172.809 98.714,172.809 118.067,172.809 135.962,172.809 149.483,172.809 ; 90.191,175.309 98.714,175.309 118.067,175.309 135.962,175.309 149.483,175.309 ; 90.191,177.809 98.714,177.809 118.067,177.809 135.962,177.809 149.483,177.809 ; 90.191,180.309 98.714,180.309 118.067,180.309 135.962,180.309 149.483,180.309 ; 90.191,182.809 98.714,182.809 118.067,182.809 135.962,182.809 149.483,182.809 ; 90.191,185.309 149.483,185.309 ; 98.652,135.45 98.652,162.95 ; 98.714,187.809 98.714,157.809 ; 110.068,135.45 110.068,162.95 ; 118.067,187.809 118.067,157.809 ; 132.282,135.45 132.282,162.95 ; 135.962,187.809 135.962,157.809 ; 140.5,135.45 140.5,162.95 ; 98.714,157.809 118.067,157.809 ; 98.714,157.809 90.191,157.809 90.191,187.809 149.483,187.809 149.483,157.809 135.962,157.809 ; 118.067,157.809 135.962,157.809 ; 89.684,135.45 153.266,135.45 153.266,162.95 89.684,162.95 89.684,135.45
  text "Layer" at 91.64,185.934 h1.25
  text "Name" at 100.164,185.934 h1.25
  text "Material" at 119.517,185.934 h1.25
  text "Thickness" at 137.412,185.934 h1.25
  text "Top Overlay" at 100.164,183.434 h1.25
  text "Top Solder" at 100.164,180.934 h1.25
  text "Solder Resist" at 119.517,180.934 h1.25
  text "0.010mm" at 137.412,180.934 h1.25
  text "1" at 91.64,178.434 h1.25
  text "Top Layer" at 100.164,178.434 h1.25
  text "0.038mm" at 137.412,178.434 h1.25
  text "Dielectric1" at 100.164,175.934 h1.25
  text "FR-4" at 119.517,175.934 h1.25
  text "0.210mm" at 137.412,175.934 h1.25
  text "2" at 91.64,173.434 h1.25
  text "Inner Layer 1" at 100.164,173.434 h1.25
  text "0.035mm" at 137.412,173.434 h1.25
  text "Dielectric 3" at 100.164,170.934 h1.25
  text "1.016mm" at 137.412,170.934 h1.25
  text "3" at 91.64,168.434 h1.25
  text "Inner Layer 2" at 100.164,168.434 h1.25
  text "0.035mm" at 137.412,168.434 h1.25
  text "Dielectric 2" at 100.164,165.934 h1.25
  text "0.210mm" at 137.412,165.934 h1.25
  text "4" at 91.64,163.434 h1.25
  text "Bottom Layer" at 100.164,163.434 h1.25
  text "0.038mm" at 137.412,163.434 h1.25
  text "Symbol" at 91.184,161.2 h1.2
  text "Hit Count" at 99.402,161.2 h1.2
  text "Finished Hole Size" at 110.818,161.2 h1.2
  text "Plated" at 133.032,161.2 h1.2
  text "Hole Type" at 141.25,161.2 h1.2
  text "Bottom Solder" at 100.164,160.934 h1.25
  text "Solder Resist" at 119.517,160.934 h1.25
  text "0.010mm" at 137.412,160.934 h1.25
  text "1" at 99.402,158.7 h1
  text "118.11mil (3.000mm)" at 110.818,158.7 h1
  text "NPTH" at 133.032,158.7 h1
  text "Round" at 141.25,158.7 h1
  text "Bottom Overlay" at 100.164,158.434 h1.25
  text "3" at 99.402,156.2 h1
  text "133.86mil (3.400mm)" at 110.818,156.2 h1
  text "PTH" at 133.032,156.2 h1
  text "Round" at 141.25,156.2 h1
  text "Total board thickness:" at 91.64,155.934 h1.25
  text "1.602mm" at 137.412,155.934 h1.25
  text "4" at 99.402,153.7 h1
  text "80.71mil (2.050mm)" at 110.818,153.7 h1
  text "NPTH" at 133.032,153.7 h1
  text "Round" at 141.25,153.7 h1
  text "4" at 99.402,151.2 h1
  text "125.98mil (3.200mm)" at 110.818,151.2 h1
  text "PTH" at 133.032,151.2 h1
  text "Round" at 141.25,151.2 h1
  text "9" at 99.402,148.7 h1
  text "40.95mil (1.040mm)" at 110.818,148.7 h1
  text "PTH" at 133.032,148.7 h1
  text "Round" at 141.25,148.7 h1
  text "9" at 99.402,146.2 h1
  text "42.91mil (1.090mm)" at 110.818,146.2 h1
  text "PTH" at 133.032,146.2 h1
  text "Round" at 141.25,146.2 h1
  text "12" at 99.402,143.7 h1
  text "40.16mil (1.020mm)" at 110.818,143.7 h1
  text "PTH" at 133.032,143.7 h1
  text "Round" at 141.25,143.7 h1
  text "30" at 99.402,141.2 h1
  text "43.70mil (1.110mm)" at 110.818,141.2 h1
  text "PTH" at 133.032,141.2 h1
  text "Round" at 141.25,141.2 h1
  text "34" at 99.402,138.7 h1
  text "11.81mil (0.300mm)" at 110.818,138.7 h1
  text "PTH" at 133.032,138.7 h1
  text "Round" at 141.25,138.7 h1
  text "106 Total" at 99.402,136.2 h1

## Text inside footprints (layer, text, board x,y; h text height)
J1: Dimensions "PCB Edge" at -1.1,24.9 h1.02 r270
P1: Dimensions "PCB Edge" at 54.82,23.3 h1.02 r90
U2: Top Overlay "USB" at 30.862,47.752 h1.52 r180